# EAGLE board probeStationBoard (EAGLE 9.1.0)
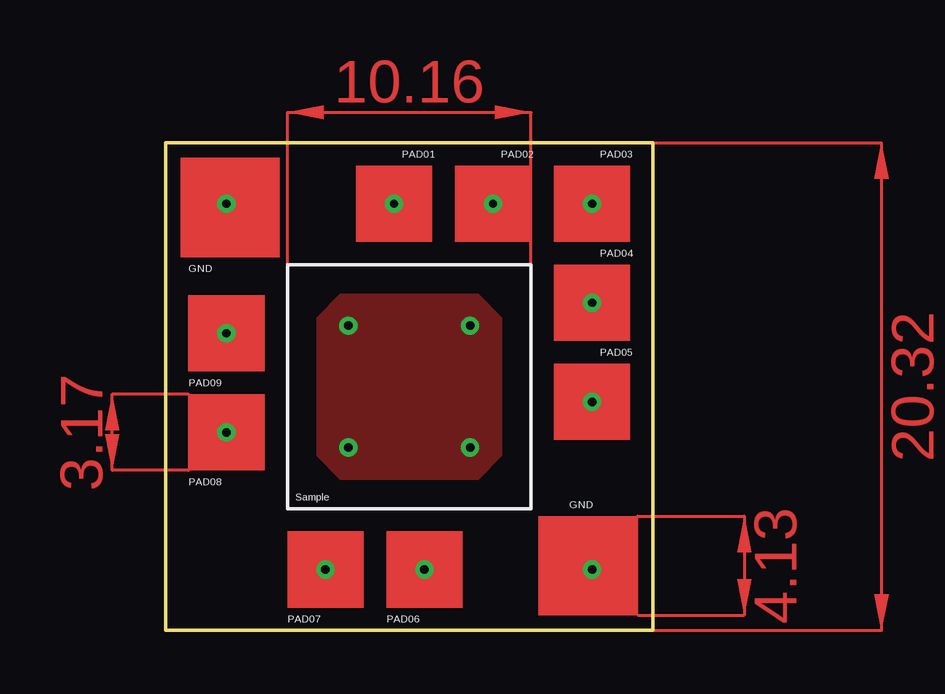
[diagram p0: board, top side]
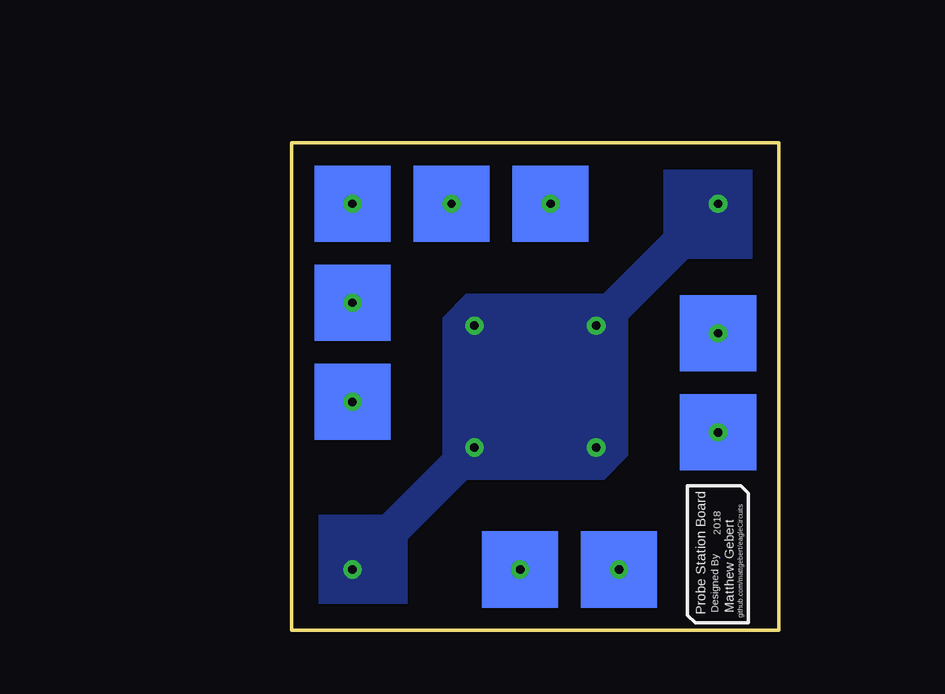
[diagram p1: board, bottom side, seen from below]

Size 20.32 x 20.32 mm. Coordinates in mm from the lower left corner, seen from the top.
Outline: 0,0 20.31,0 20.31,20.31 0,20.31 0,0
Outline: 0,0 0,20.32 20.32,20.32 20.32,0 0,0
Copper layers (1*16): Top 0.035mm / dielectric 1.5mm / Bottom 0.035mm
Design rules "default": minimum track width 6mil, minimum drill 0.35mm, track to track 6mil, track to pad 6mil, pad to pad 6mil, via to via 6mil, smd to smd 6mil, copper to edge 40mil, drill to drill 6mil, minimum pad ring 10mil, minimum via ring 8mil, stop-mask expansion 4mil, vias tented up to drill 0mil, thermal gap 10mil

## Placement (x,y rotation side)
FRAME1  FRAME-LETTERNO_PACKAGE  [DUMMY]  -13.97,1.27 0 top  (outside the outline)

## Library data of the parts
FRAME1 = SparkFun-Aesthetics; DESIGNER: Nobody; VERSION: v01

## Tracks (layer width: path | path; a pad name or v marks a point on that pad's centre or on a via)
GND  (via drill 0.35)
  other vias: 7.62,7.62 7.62,12.7 12.7,12.7 12.7,7.62 17.78,2.54 2.54,17.78
  pour Top: 6.35,7.3 7.3,6.35 13.02,6.35 13.97,7.3 13.97,13.02 13.02,13.97 7.3,13.97 6.35,13.02
  pour Bottom: 0.64,19.68 0.64,15.56 3.81,15.56 6.35,13.02 6.35,7.3 7.3,6.35 13.02,6.35 15.56,3.81 15.56,0.64 19.68,0.64 19.68,4.76 16.51,4.76 13.97,7.3 13.97,13.02 13.02,13.97 7.3,13.97 4.76,16.51 4.76,19.68
PAD1  (via drill 0.35)
  other vias: 9.53,17.78
PAD2  (via drill 0.35)
  other vias: 13.65,17.78
PAD3  (via drill 0.35)
  other vias: 17.78,17.78
PAD4  (via drill 0.35)
  other vias: 17.78,13.65
PAD5  (via drill 0.35)
  other vias: 17.78,9.53
PAD6  (via drill 0.35)
  other vias: 10.79,2.54
PAD7  (via drill 0.35)
  other vias: 6.67,2.54
PAD9  (via drill 0.35)
  other vias: 2.54,8.26
PAD10  (via drill 0.35)
  other vias: 2.54,12.38
(copper drawn outside any net)
  shapes: Bottom area x9, Top area x15

## Text on the board
tPlace: PAD01 | PAD02 | PAD03 | PAD04 | GND | PAD05 | PAD09 | PAD08 | Sample | GND | PAD07 | PAD06
bPlace: 2018 | github.com/mattgebert/eagleCircuits | Matthew Gebert | Designed By | Probe Station Board